# Altium PCB CCU-2.PcbDoc (part 2 of 3)
Units mm, origin at the board's own origin, x right, y up, seen from the top; angles counter-clockwise.
Board outline 52 x 56 mm, 4 copper layers (Top Layer, Int1 (GND), Int2 (PWR), Bottom Layer), stack 1.594 mm thick; 81 components, 50 nets, 261 pads, 97 vias.
Unrouted connection lines stored in the file: 64.
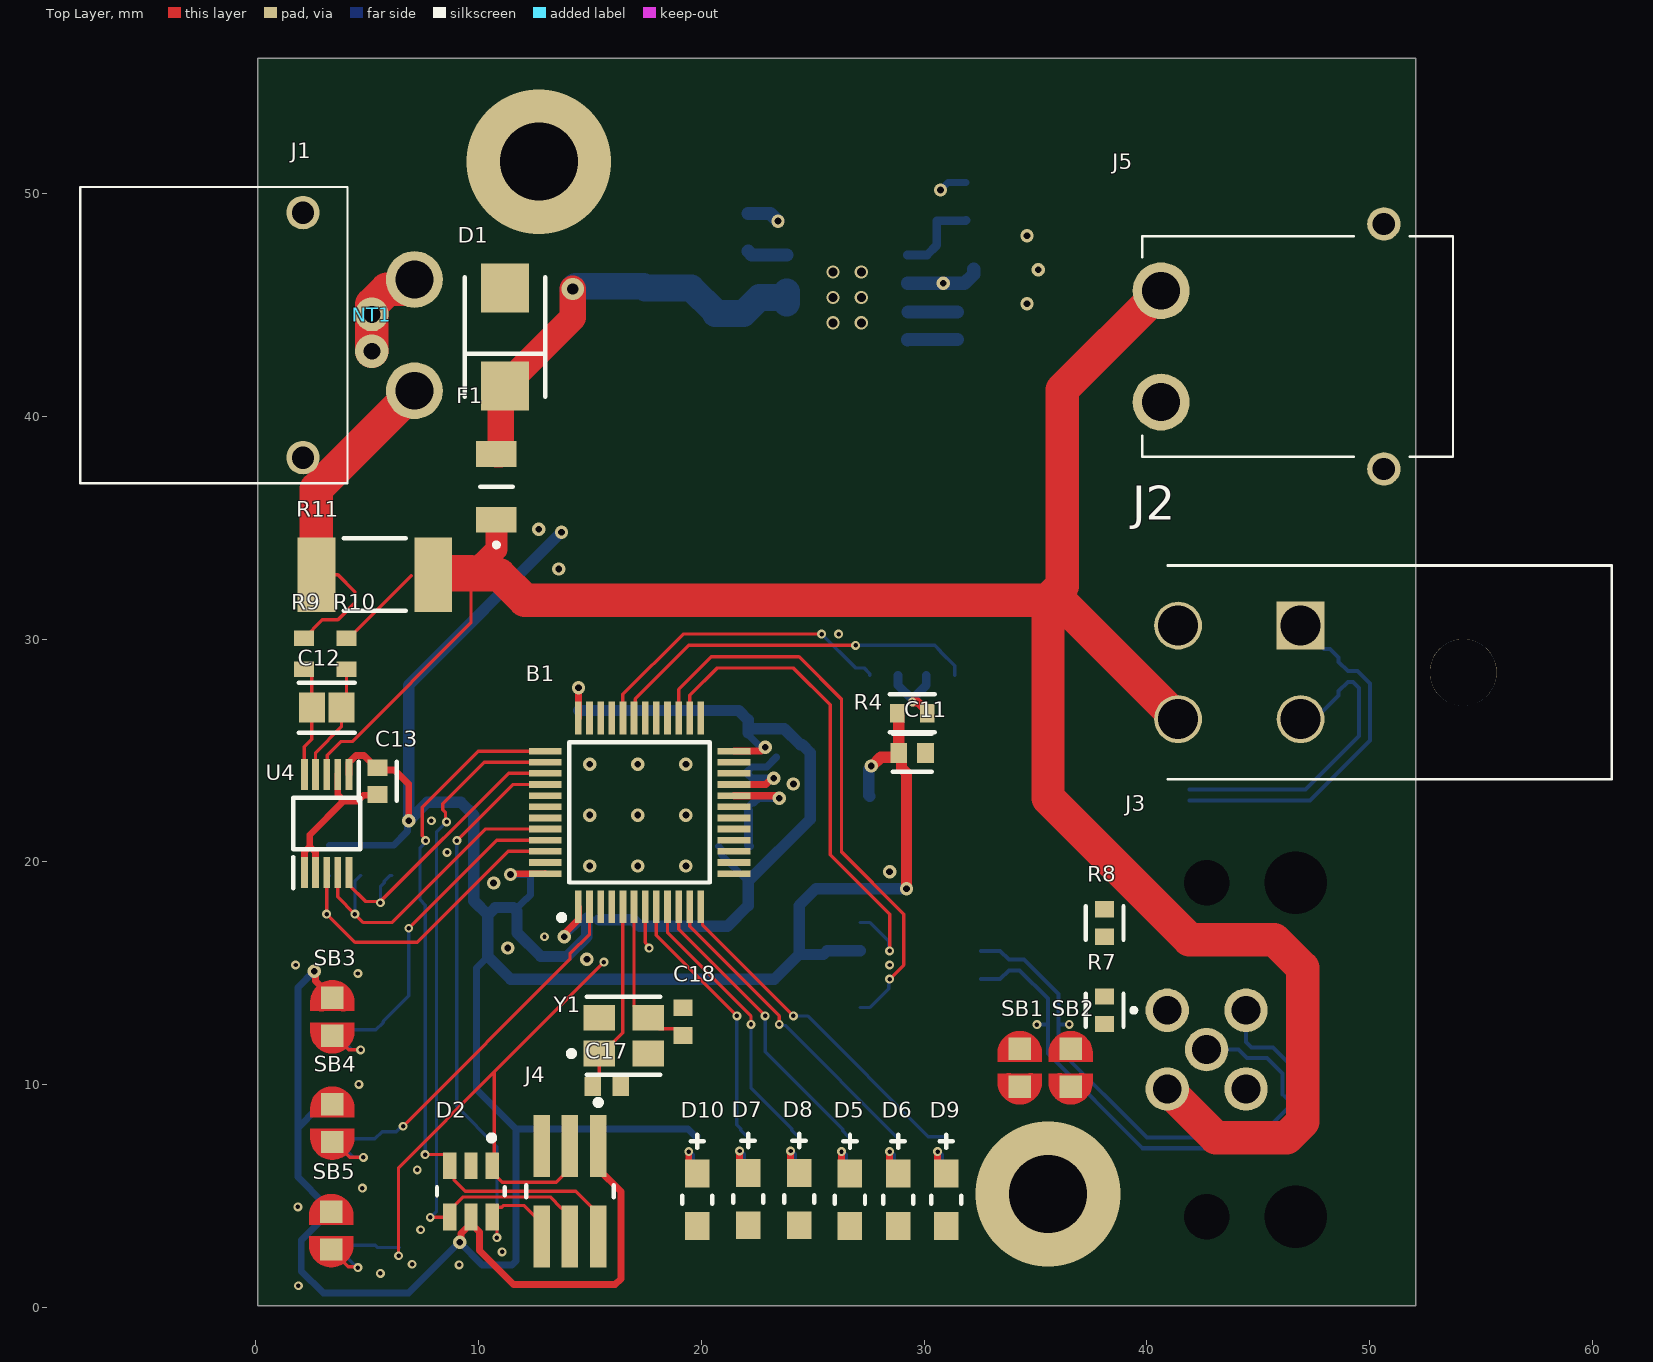
[diagram p0: Top Layer view]

## Part data (continued)
J4: library part FTSH-103-01-L-DV-TR, "Pin Header, Board-to-Board, Wire-to-Board, 1.27 mm, 2 Rows, 6 Contacts, Surface Mount, FTSH", Current Rating=3.4A, Housing Color=Black, Manufacturer=Samtec, Manufacturer Lifecycle Status=PRODUCTION, Max Current Rating=1.75A, Max Operating Temperature=125°C, Min Operating Temperature=-55°C, Supplier Part Number=1802874, Category="Headers and Wire Housings", ComponentLink1Description=https://sigma.octopart.com:443/152766371/technical_drawing/Samtec-FTSH-103-01-L-DV-TR.pdf?src-supplier=Upverter, ComponentLink1URL=https://sigma.octopart.com:443/152766371/technical_drawing/Samtec-FTSH-103-01-L-DV-TR.pdf?src-supplier=Upverter, ComponentLink2Description=https://sigma.octopart.com:443/97029548/technical_drawing/Samtec-FTSH-103-01-L-DV-TR.pdf?src-supplier=Electro+Sonic, ComponentLink2URL=https://sigma.octopart.com:443/97029548/technical_drawing/Samtec-FTSH-103-01-L-DV-TR.pdf?src-supplier=Electro+Sonic, ComponentLink3Description=https://datasheet.octopart.com:443/FTSH-103-01-L-DV-TR-Samtec-datasheet-97029545.pdf?src-supplier=Samtec, ComponentLink3URL=https://datasheet.octopart.com:443/FTSH-103-01-L-DV-TR-Samtec-datasheet-97029545.pdf?src-supplier=Samtec, ComponentLink4Description=https://datasheet.octopart.com:443/FTSH-103-01-L-DV-TR-Samtec-datasheet-140825048.pdf?src-supplier=Master+Electronics, ComponentLink4URL=https://datasheet.octopart.com:443/FTSH-103-01-L-DV-TR-Samtec-datasheet-140825048.pdf?src-supplier=Master+Electronics, ComponentLink5Description=https://datasheet.octopart.com:443/FTSH-103-01-L-DV-TR-Samtec-datasheet-137003348.pdf?src-supplier=Master+Electronics, ComponentLink5URL=https://datasheet.octopart.com:443/FTSH-103-01-L-DV-TR-Samtec-datasheet-137003348.pdf?src-supplier=Master+Electronics, ComponentLink6Description=https://datasheet.octopart.com:443/FTSH-103-01-L-DV-TR-Samtec-datasheet-62087996.pdf?src-supplier=element14+APAC, ComponentLink6URL=https://datasheet.octopart.com:443/FTSH-103-01-L-DV-TR-Samtec-datasheet-62087996.pdf?src-supplier=element14+APAC, ComponentLink7Description=https://datasheet.octopart.com:443/FTSH-103-01-L-DV-TR-Samtec-datasheet-86818370.pdf?src-supplier=Sager+Electronics, ComponentLink7URL=https://datasheet.octopart.com:443/FTSH-103-01-L-DV-TR-Samtec-datasheet-86818370.pdf?src-supplier=Sager+Electronics, ComponentLink8Description=https://datasheet.octopart.com:443/FTSH-103-01-L-DV-TR-Samtec-datasheet-151470459.pdf?src-supplier=Sager+Electronics, ComponentLink8URL=https://datasheet.octopart.com:443/FTSH-103-01-L-DV-TR-Samtec-datasheet-151470459.pdf?src-supplier=Sager+Electronics, ComponentLink9Description=https://datasheet.octopart.com:443/FTSH-103-01-L-DV-TR-Samtec-datasheet-151470458.pdf?src-supplier=Sager+Electronics, ComponentLink9URL=https://datasheet.octopart.com:443/FTSH-103-01-L-DV-TR-Samtec-datasheet-151470458.pdf?src-supplier=Sager+Electronics, ComponentLink10Description=https://datasheet.octopart.com:443/FTSH-103-01-L-DV-TR-Samtec-datasheet-33007713.pdf?src-supplier=Farnell, ComponentLink10URL=https://datasheet.octopart.com:443/FTSH-103-01-L-DV-TR-Samtec-datasheet-33007713.pdf?src-supplier=Farnell, ComponentLink11Description=https://datasheet.octopart.com:443/FTSH-103-01-L-DV-TR-Samtec-datasheet-183475175.pdf?src-supplier=JRH+Electronics, ComponentLink11URL=https://datasheet.octopart.com:443/FTSH-103-01-L-DV-TR-Samtec-datasheet-183475175.pdf?src-supplier=JRH+Electronics, ComponentLink12Description=https://datasheet.octopart.com:443/FTSH-103-01-L-DV-TR-Samtec-datasheet-176663386.pdf?src-supplier=Toby+Electronics, ComponentLink12URL=https://datasheet.octopart.com:443/FTSH-103-01-L-DV-TR-Samtec-datasheet-176663386.pdf?src-supplier=Toby+Electronics, ComponentLink13Description=https://datasheet.octopart.com:443/FTSH-103-01-L-DV-TR-Samtec-datasheet-133497664.pdf?src-supplier=Toby+Electronics, ComponentLink13URL=https://datasheet.octopart.com:443/FTSH-103-01-L-DV-TR-Samtec-datasheet-133497664.pdf?src-supplier=Toby+Electronics, ComponentLink14Description=https://datasheet.octopart.com:443/FTSH-103-01-L-DV-TR-Samtec-datasheet-116535196.pdf?src-supplier=Toby+Electronics, ComponentLink14URL=https://datasheet.octopart.com:443/FTSH-103-01-L-DV-TR-Samtec-datasheet-116535196.pdf?src-supplier=Toby+Electronics, ComponentLink15Description=https://datasheet.octopart.com:443/FTSH-103-01-L-DV-TR-Samtec-datasheet-138897704.pdf?src-supplier=HQonline, ComponentLink15URL=https://datasheet.octopart.com:443/FTSH-103-01-L-DV-TR-Samtec-datasheet-138897704.pdf?src-supplier=HQonline, ComponentLink16Description=https://datasheet.octopart.com:443/FTSH-103-01-L-DV-TR-Samtec-datasheet-11553404.pdf?src-supplier=Arrow+Electronics, ComponentLink16URL=https://datasheet.octopart.com:443/FTSH-103-01-L-DV-TR-Samtec-datasheet-11553404.pdf?src-supplier=Arrow+Electronics, Contact Material="Gold, Nickel", Contact Plating=Gold, Depth=3.43mm, Gender=Male, Height=6.23mm, Housing Material=Polymer, Lead Free="Lead Free", Length=3.81mm, Lifecycle Status=Production, Manufacturer Part Number=FTSH-103-01-L-DV-TR, Number of Contacts=6, Number of Rows=2, Packaging="Tape and Reel", Pins=6, Pitch=1.27mm, Radiation Hardening=No, REACH SVHC=No, RoHS=Compliant, Stock=1, Supplier=RS, Supplier 1=RS, Supplier 2=RS, Supplier Part Number 1=1802874, Supplier Part Number 2=1976473, Termination=Solder
J5: "Plug; XT30; Male; 30A; Low Temperature Rise Fire Retardant", Manufacturer_Name=Amass, ComponentLink1Description=https://datasheet.octopart.com/XT30PW-M-Amass-datasheet-165556440.pdf?src-supplier=TME, ComponentLink1URL=https://datasheet.octopart.com/XT30PW-M-Amass-datasheet-165556440.pdf?src-supplier=TME, Datasheet Link=https://www.tme.eu/sl/Document/ce4077e36b79046da520ca73227e15de/XT30PW%20SPEC.pdf, Geometry.Height=5mm, Manufacturer_Part_Number=XT30PW-M
L1: library part XAL7070-472MEC, "General Purpose Inductor, 4.7uH, 20%, 1 Element, Composite-Core, SMD, 3028", Ambient Temperature Range High=125°C, Case/Package=SMD/SMT, DC Resistance (DCR)=14.26mΩ, Inductance Tolerance=20%, Manufacturer=Coilcraft, Manufacturer_Name=COILCRAFT, Max Current Rating=13.6A, Min Operating Temperature=-40°C, Mouser Part Number=994-XAL7070-472MEC, Saturation Current=15.2A, Self Resonant Frequency=26MHz, Supplier Part Number=2289129, Test Frequency=1MHz, Category="Fixed Inductors", ComponentLink1Description=https://datasheet.octopart.com:443/XAL7070-472MEC-Coilcraft-datasheet-180122068.pdf?src-supplier=IHS, ComponentLink1URL=https://datasheet.octopart.com:443/XAL7070-472MEC-Coilcraft-datasheet-180122068.pdf?src-supplier=IHS, ComponentLink2Description=https://datasheet.octopart.com:443/XAL7070-472MEC-Coilcraft-datasheet-10791984.pdf?src-supplier=Coilcraft+Direct, ComponentLink2URL=https://datasheet.octopart.com:443/XAL7070-472MEC-Coilcraft-datasheet-10791984.pdf?src-supplier=Coilcraft+Direct, ComponentLink3Description=https://datasheet.octopart.com:443/XAL7070-472MEC-Coilcraft-datasheet-181955335.pdf?src-supplier=Newark, ComponentLink3URL=https://datasheet.octopart.com:443/XAL7070-472MEC-Coilcraft-datasheet-181955335.pdf?src-supplier=Newark, ComponentLink4Description=https://datasheet.octopart.com:443/XAL7070-472MEC-Coilcraft-datasheet-14354386.pdf?src-supplier=Newark, ComponentLink4URL=https://datasheet.octopart.com:443/XAL7070-472MEC-Coilcraft-datasheet-14354386.pdf?src-supplier=Newark, Core Material=Composite, Datasheet Link=https://www.coilcraft.com/pdfs/xal7070.pdf, ESR=14.26mΩ, Geometry.Height=7mm, Height=7mm, Lead Free="Contains Lead", Length=8mm, Lifecycle Status=Production, Manufacturer Part Number=XAL7070-472MEC, Manufacturer_Part_Number=XAL7070-472MEC, Max DC Current=13.6A, Max Operating Temperature=125°C, Mounting Technology="Surface Mount", Mouser Price/Stock=https://www.mouser.co.uk/ProductDetail/Coilcraft/XAL7070-472MEC?qs=zCSbvcPd3pZar3i%2F4%252BSjWg%3D%3D, Number of Circuits=1, Number of Terminals=2, Packaging="Cut Tape", REACH SVHC=Yes, RMS Current (Irms)=13.6A, RoHS=Compliant, Shielding=Yes, Stock=742, Supplier=Farnell, Termination=SMD/SMT, Tolerance=20%, Width=7.2mm
NT1: library part NetTie_SMD, "Net Tie SMD"